# Altium PCB ChassisPowerDistroA_PSoC_1.0_GK.PcbDoc (part 1 of 2)
Units mil, origin at the board's own origin, x right, y up, seen from the top; angles counter-clockwise.
Board outline 6000 x 4000 mil, 4 copper layers (Top Layer, Int1 (GND), Int2 (PWR), Bottom Layer), stack 53.912 mil thick; 194 components, 92 nets, 571 pads, 130 vias.
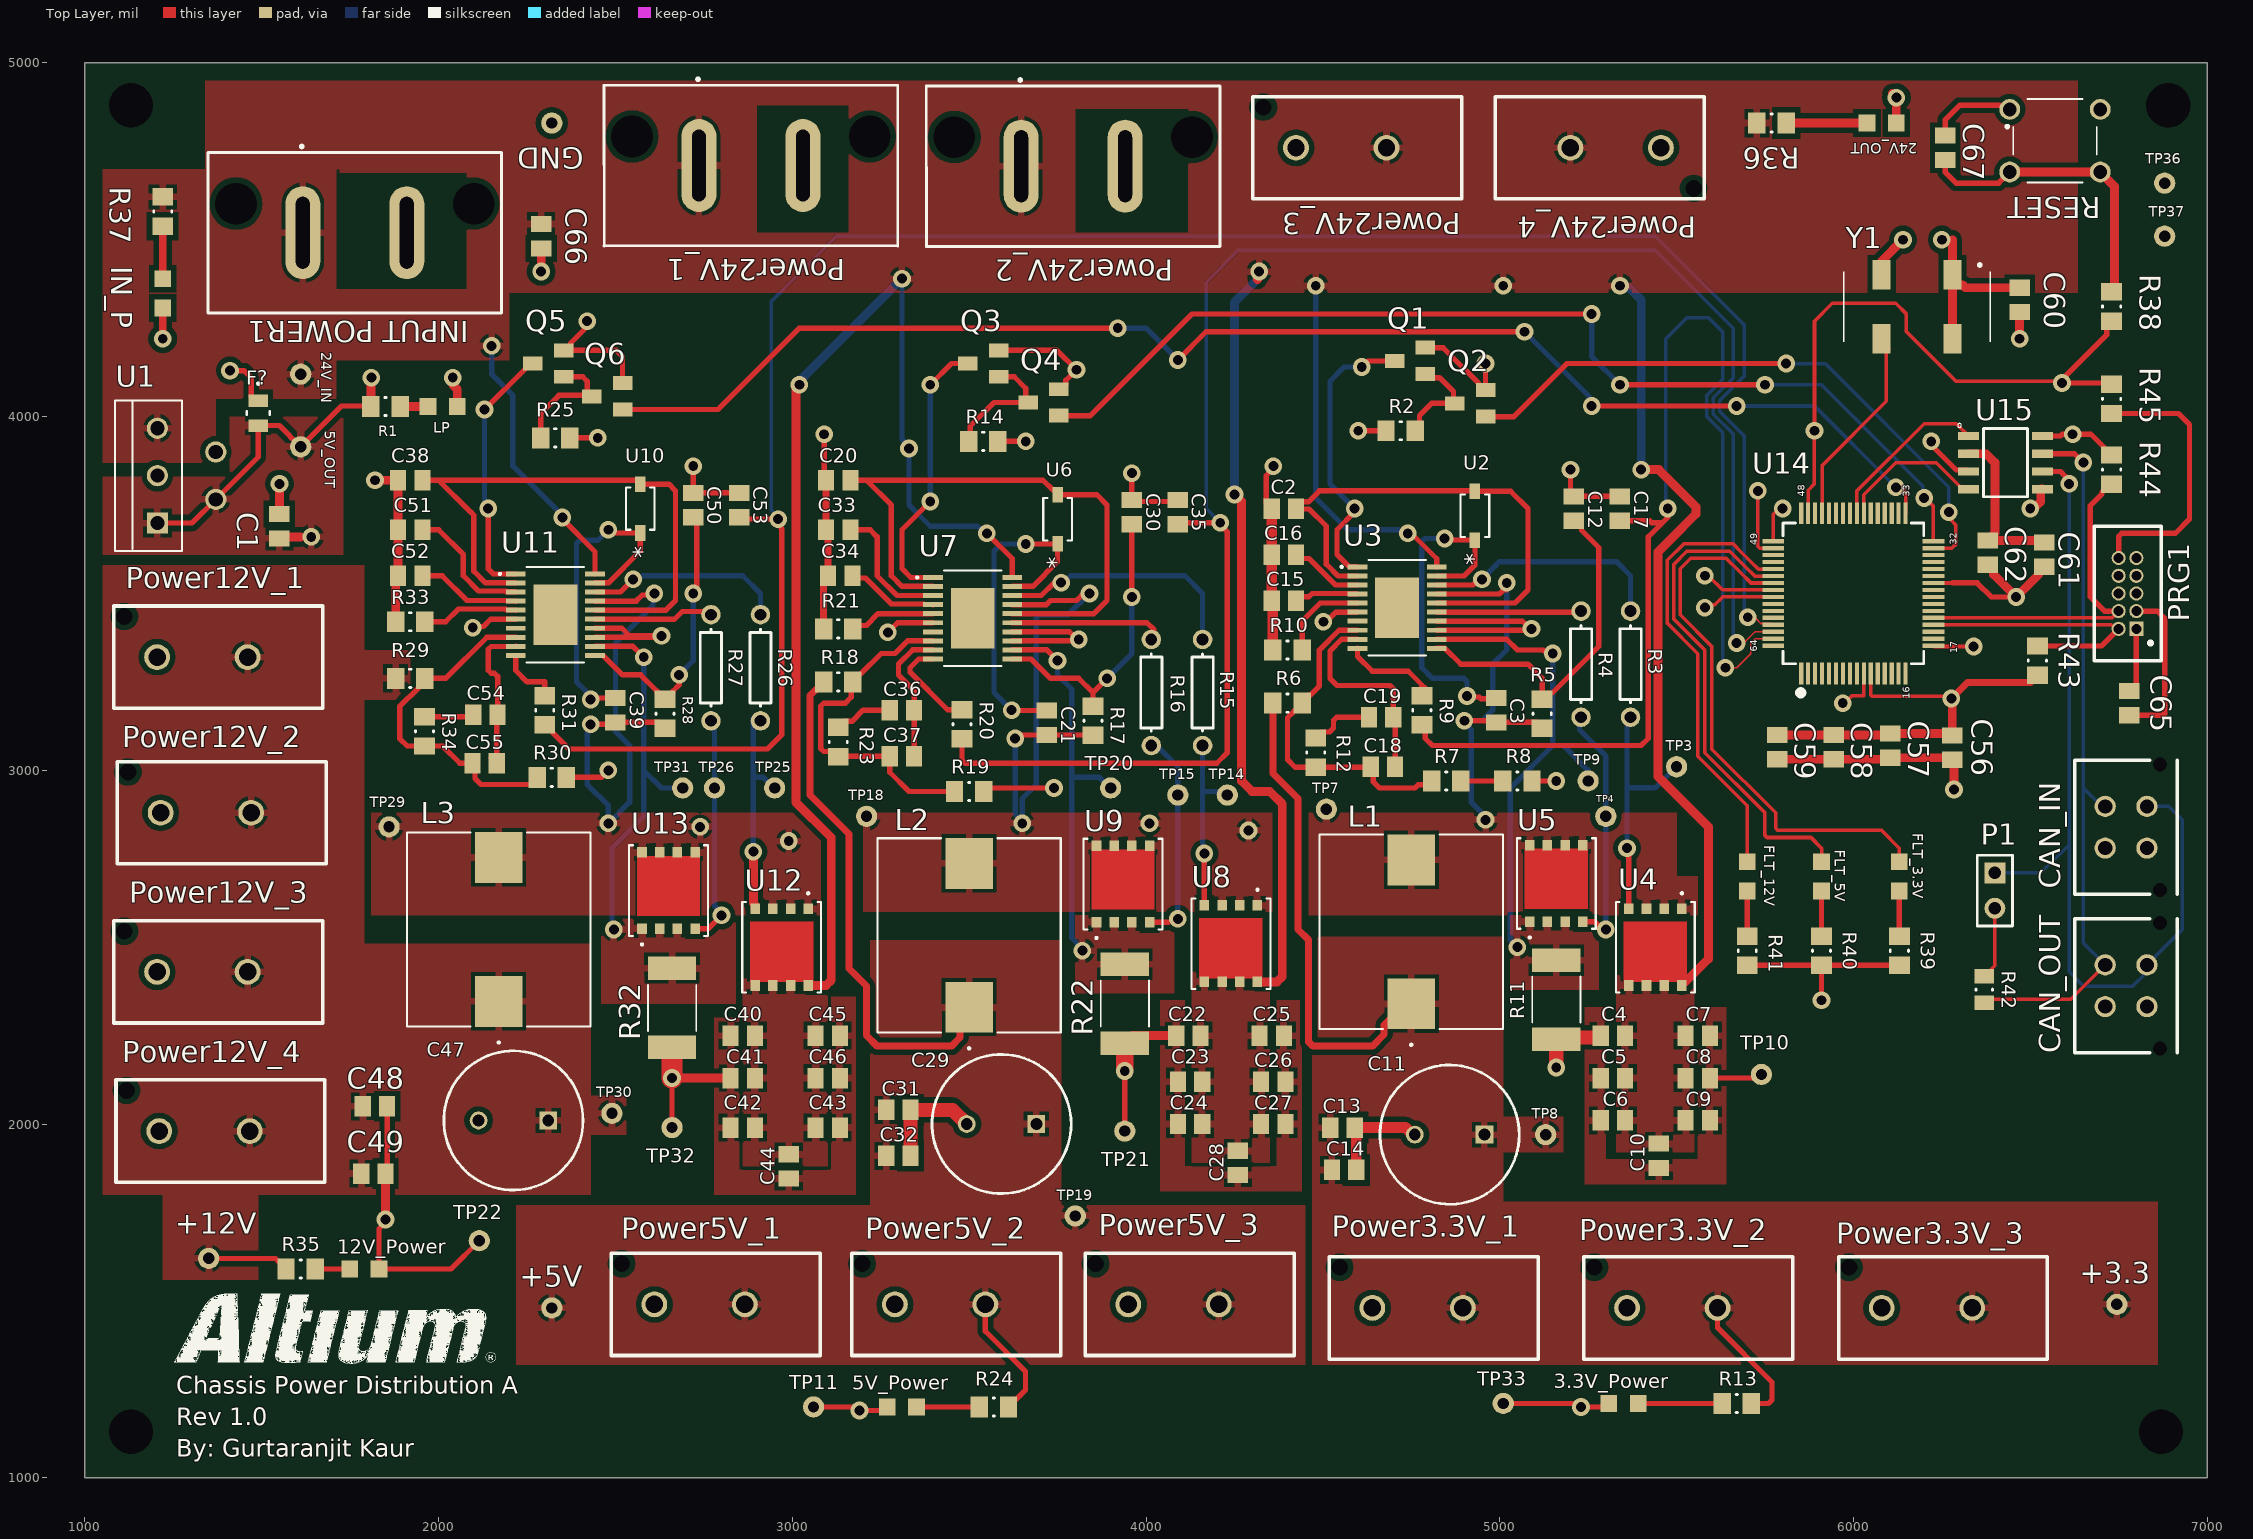
[diagram p0: Top Layer view]
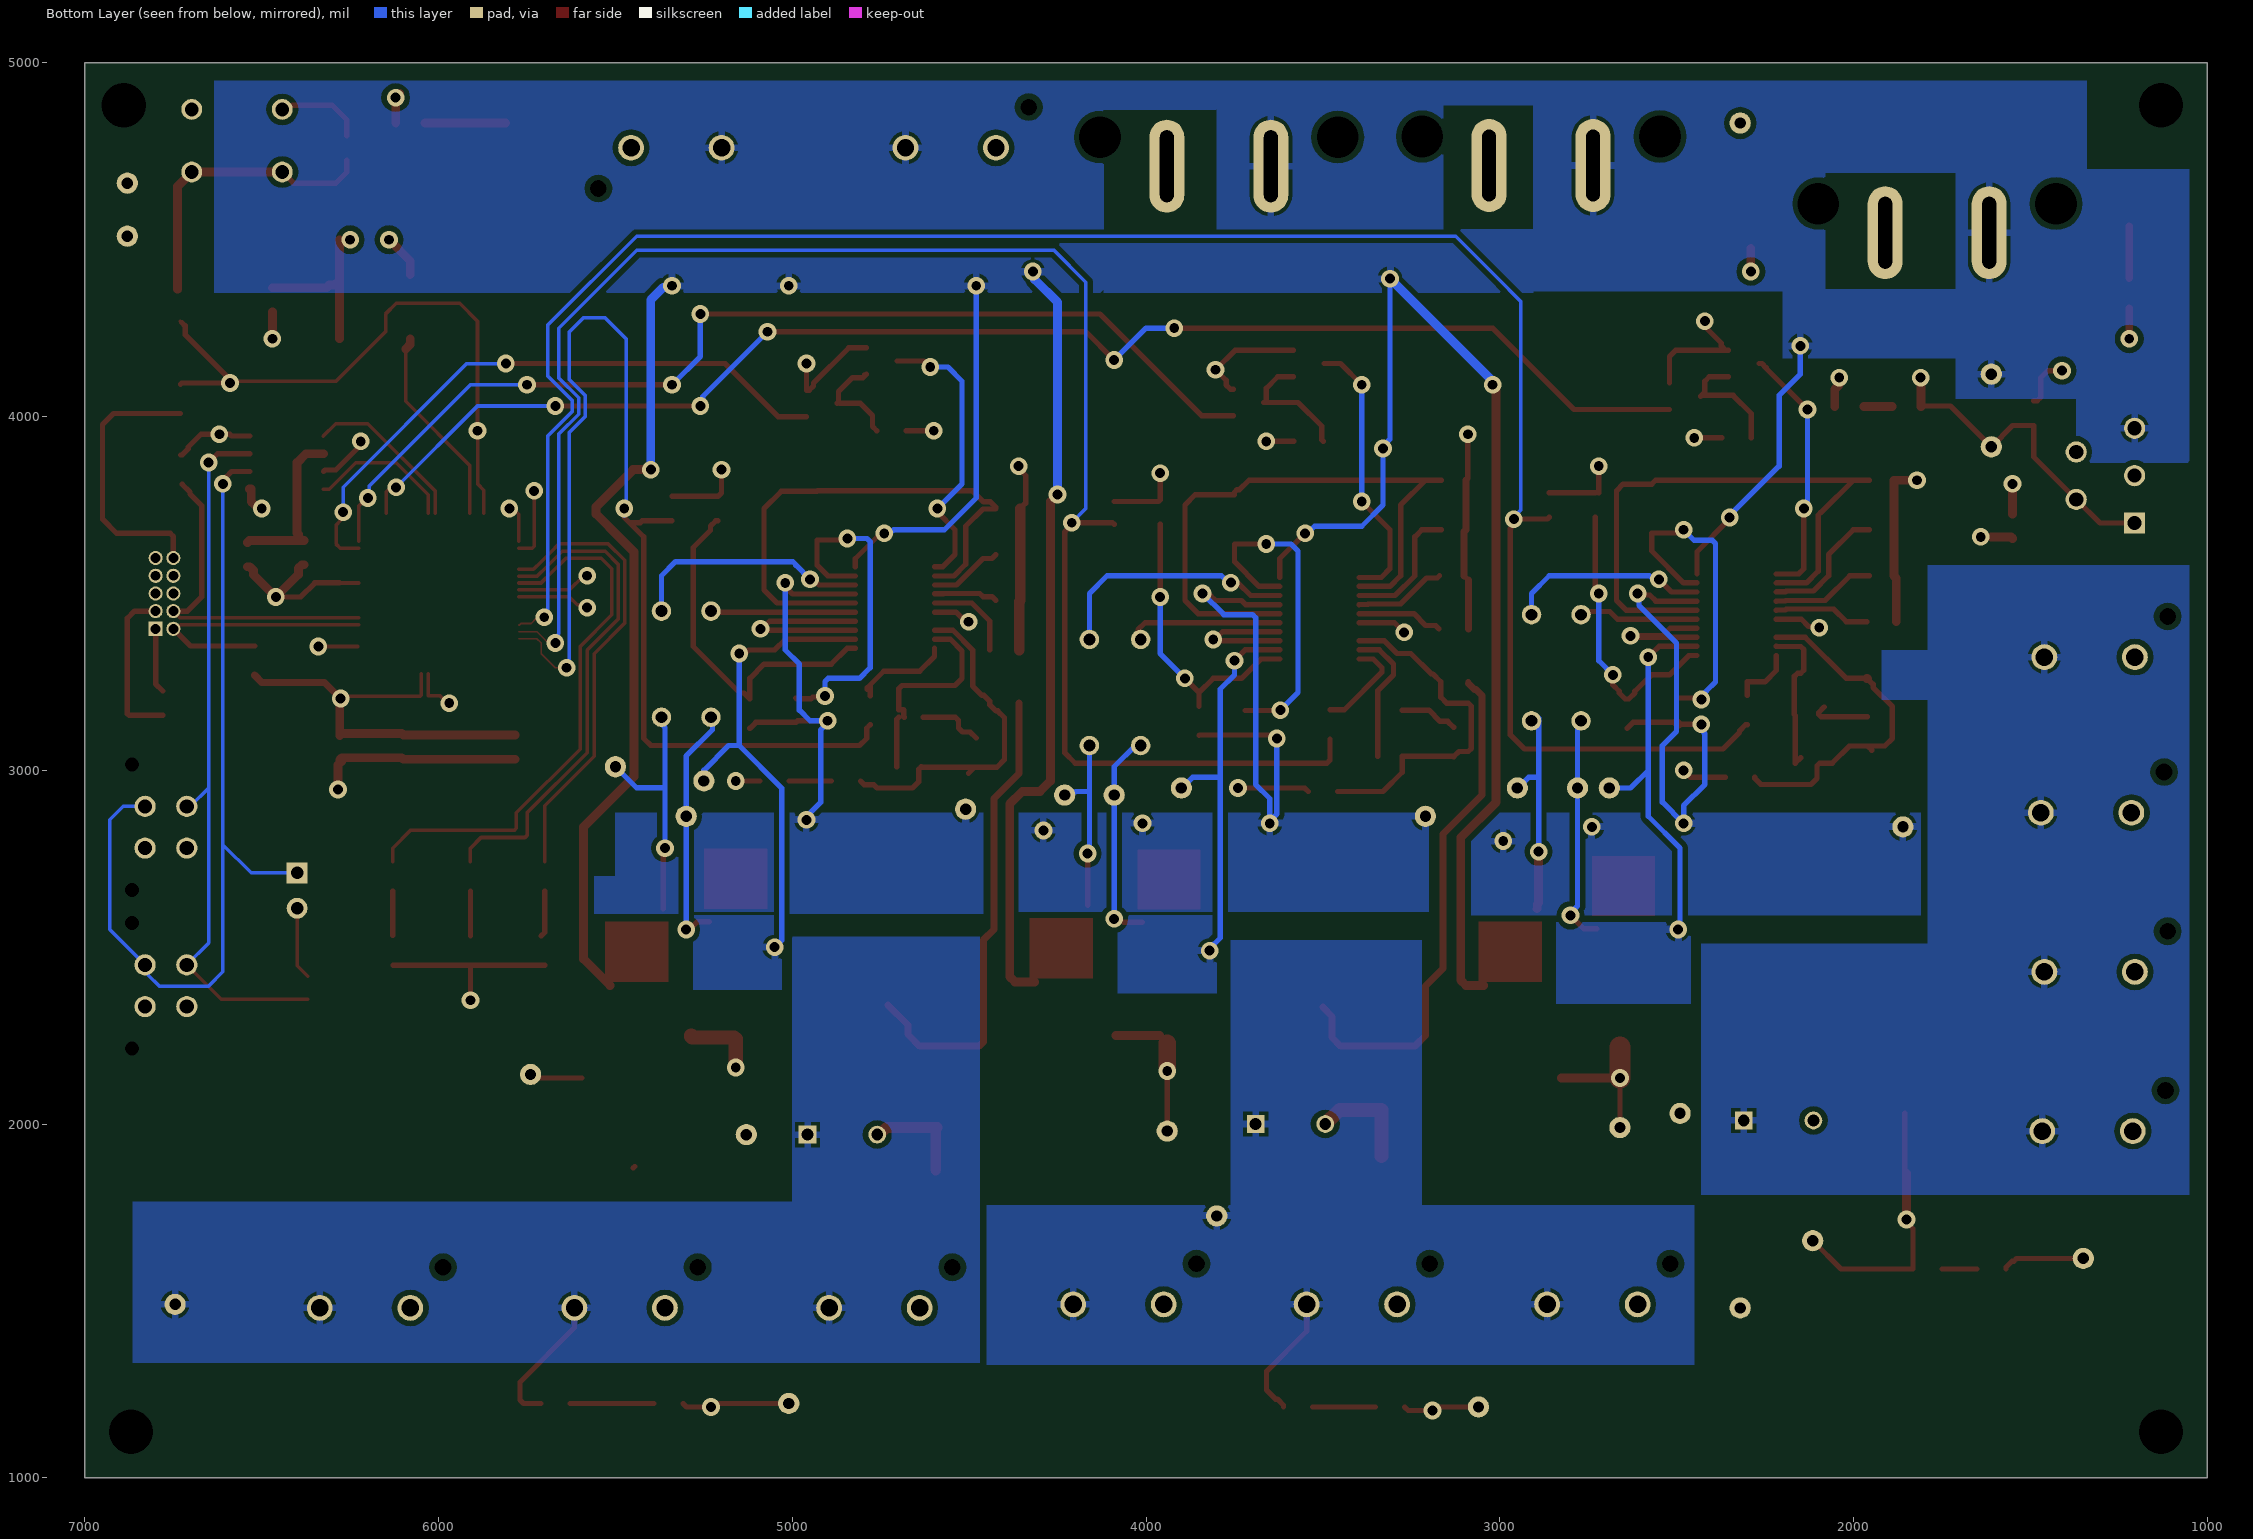
[diagram p1: Bottom Layer view, seen from below]
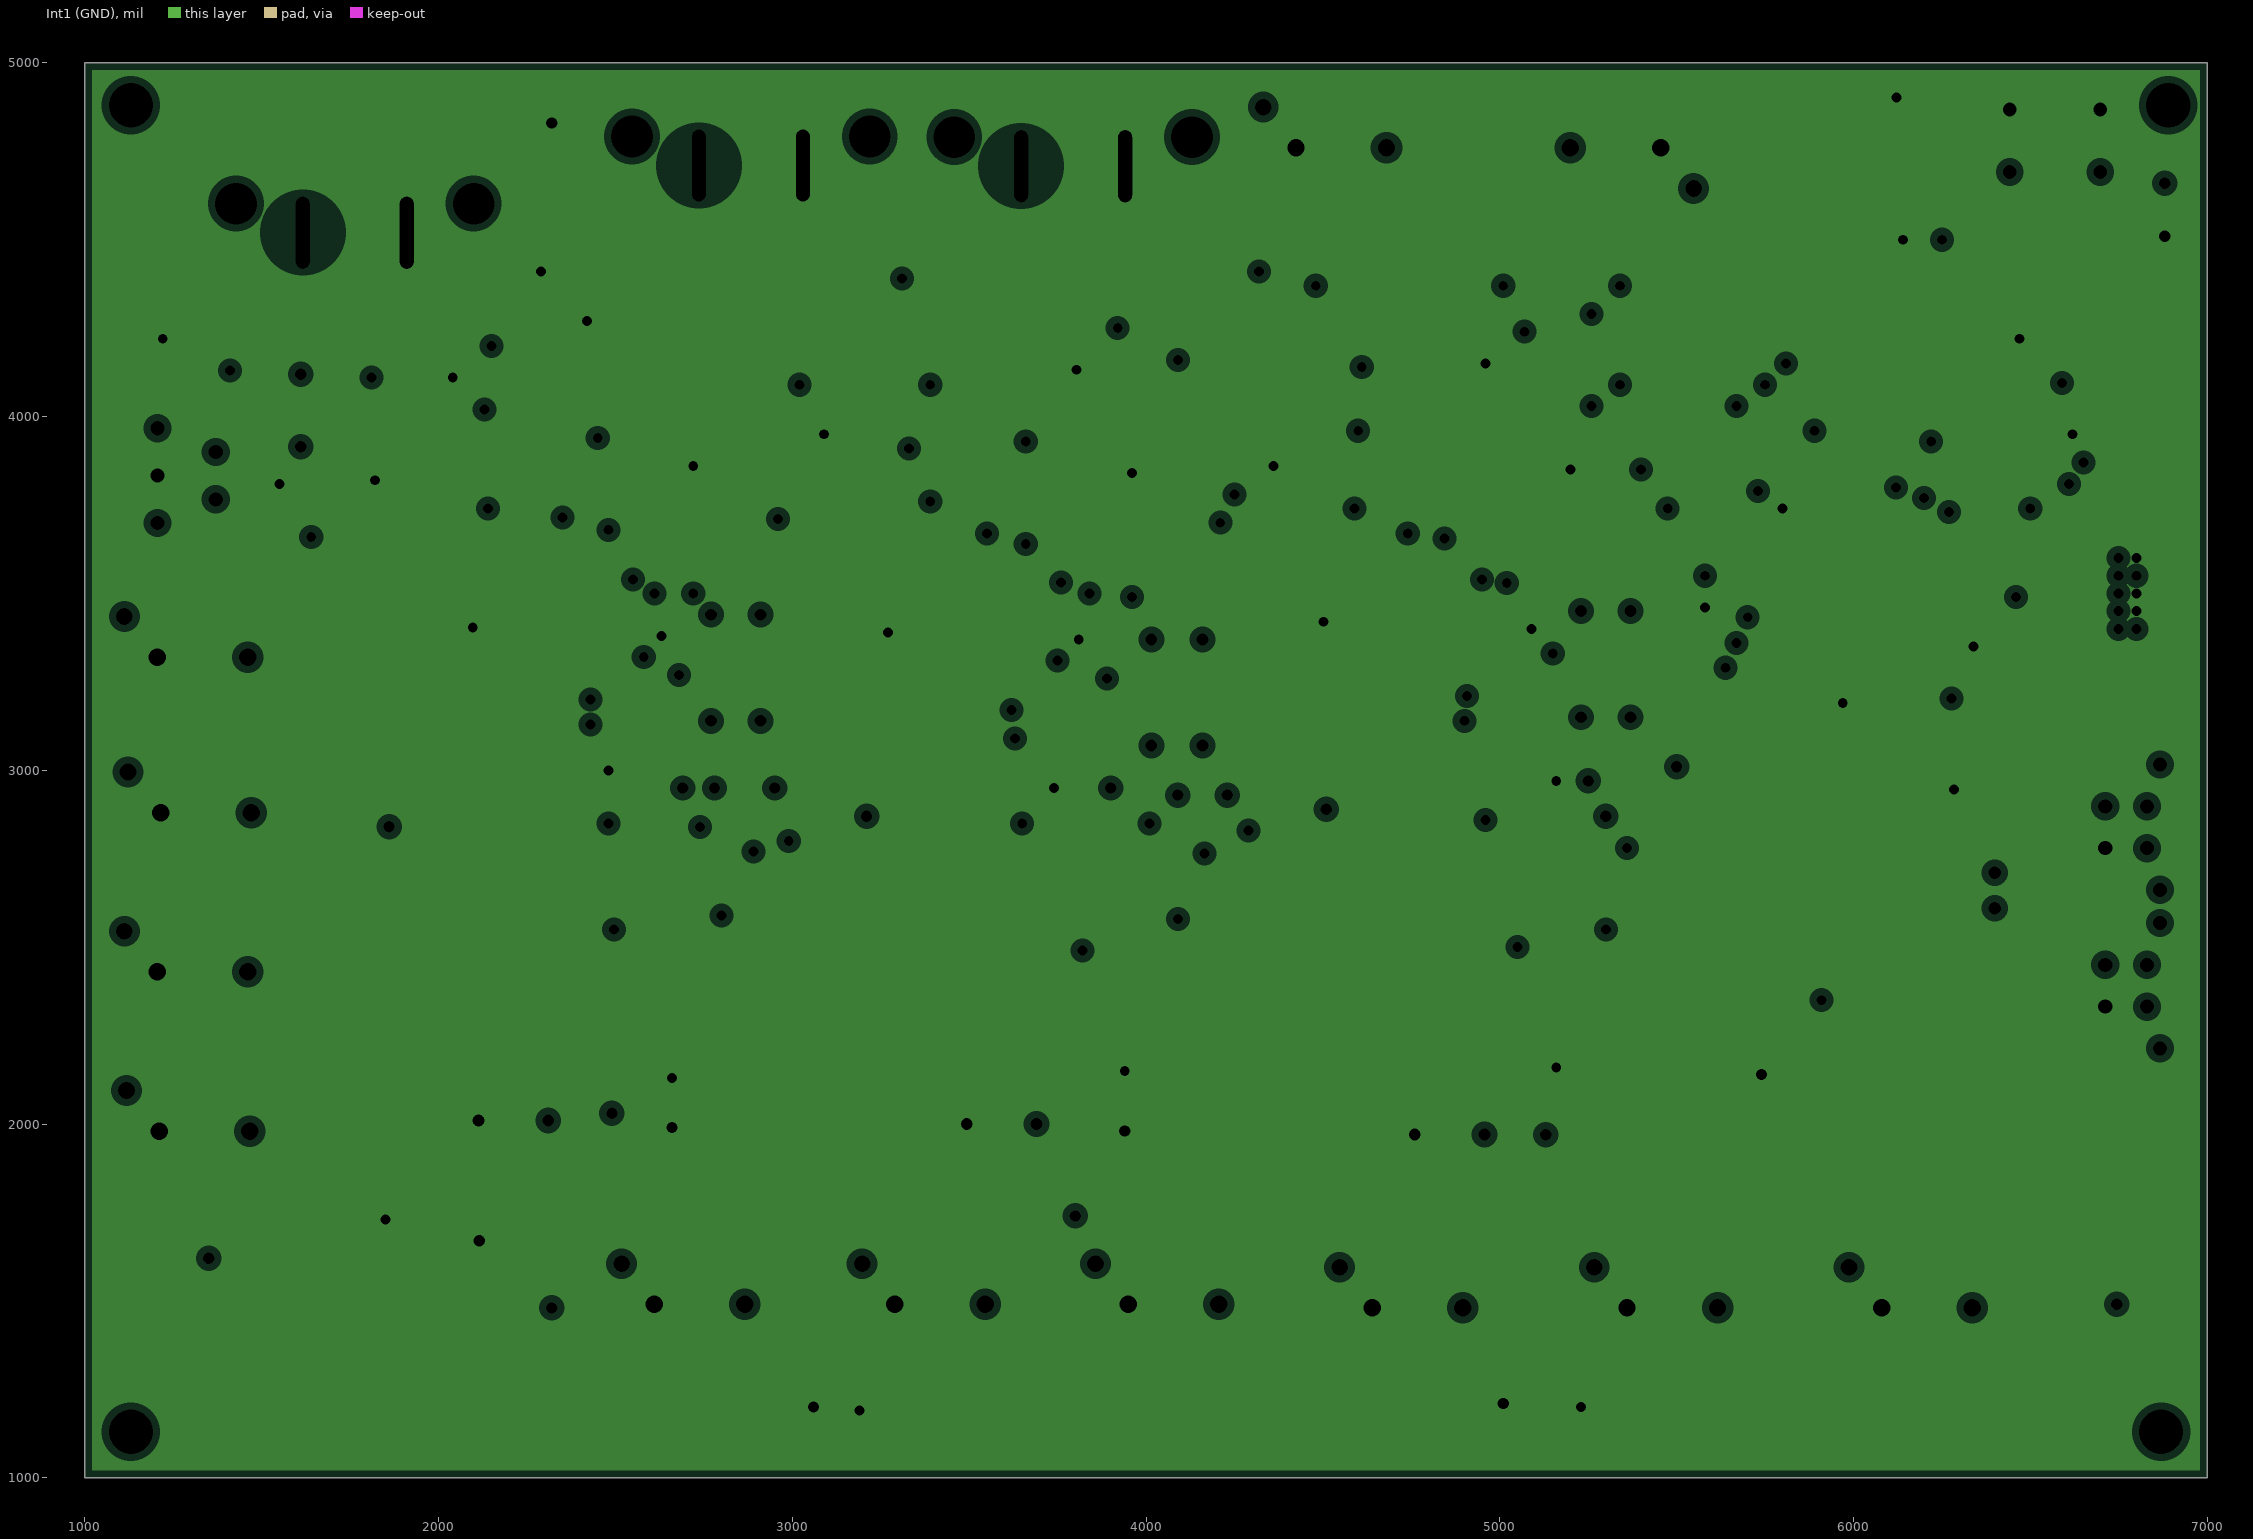
[diagram p2: Int1 (GND), clearances drawn from the general rule]
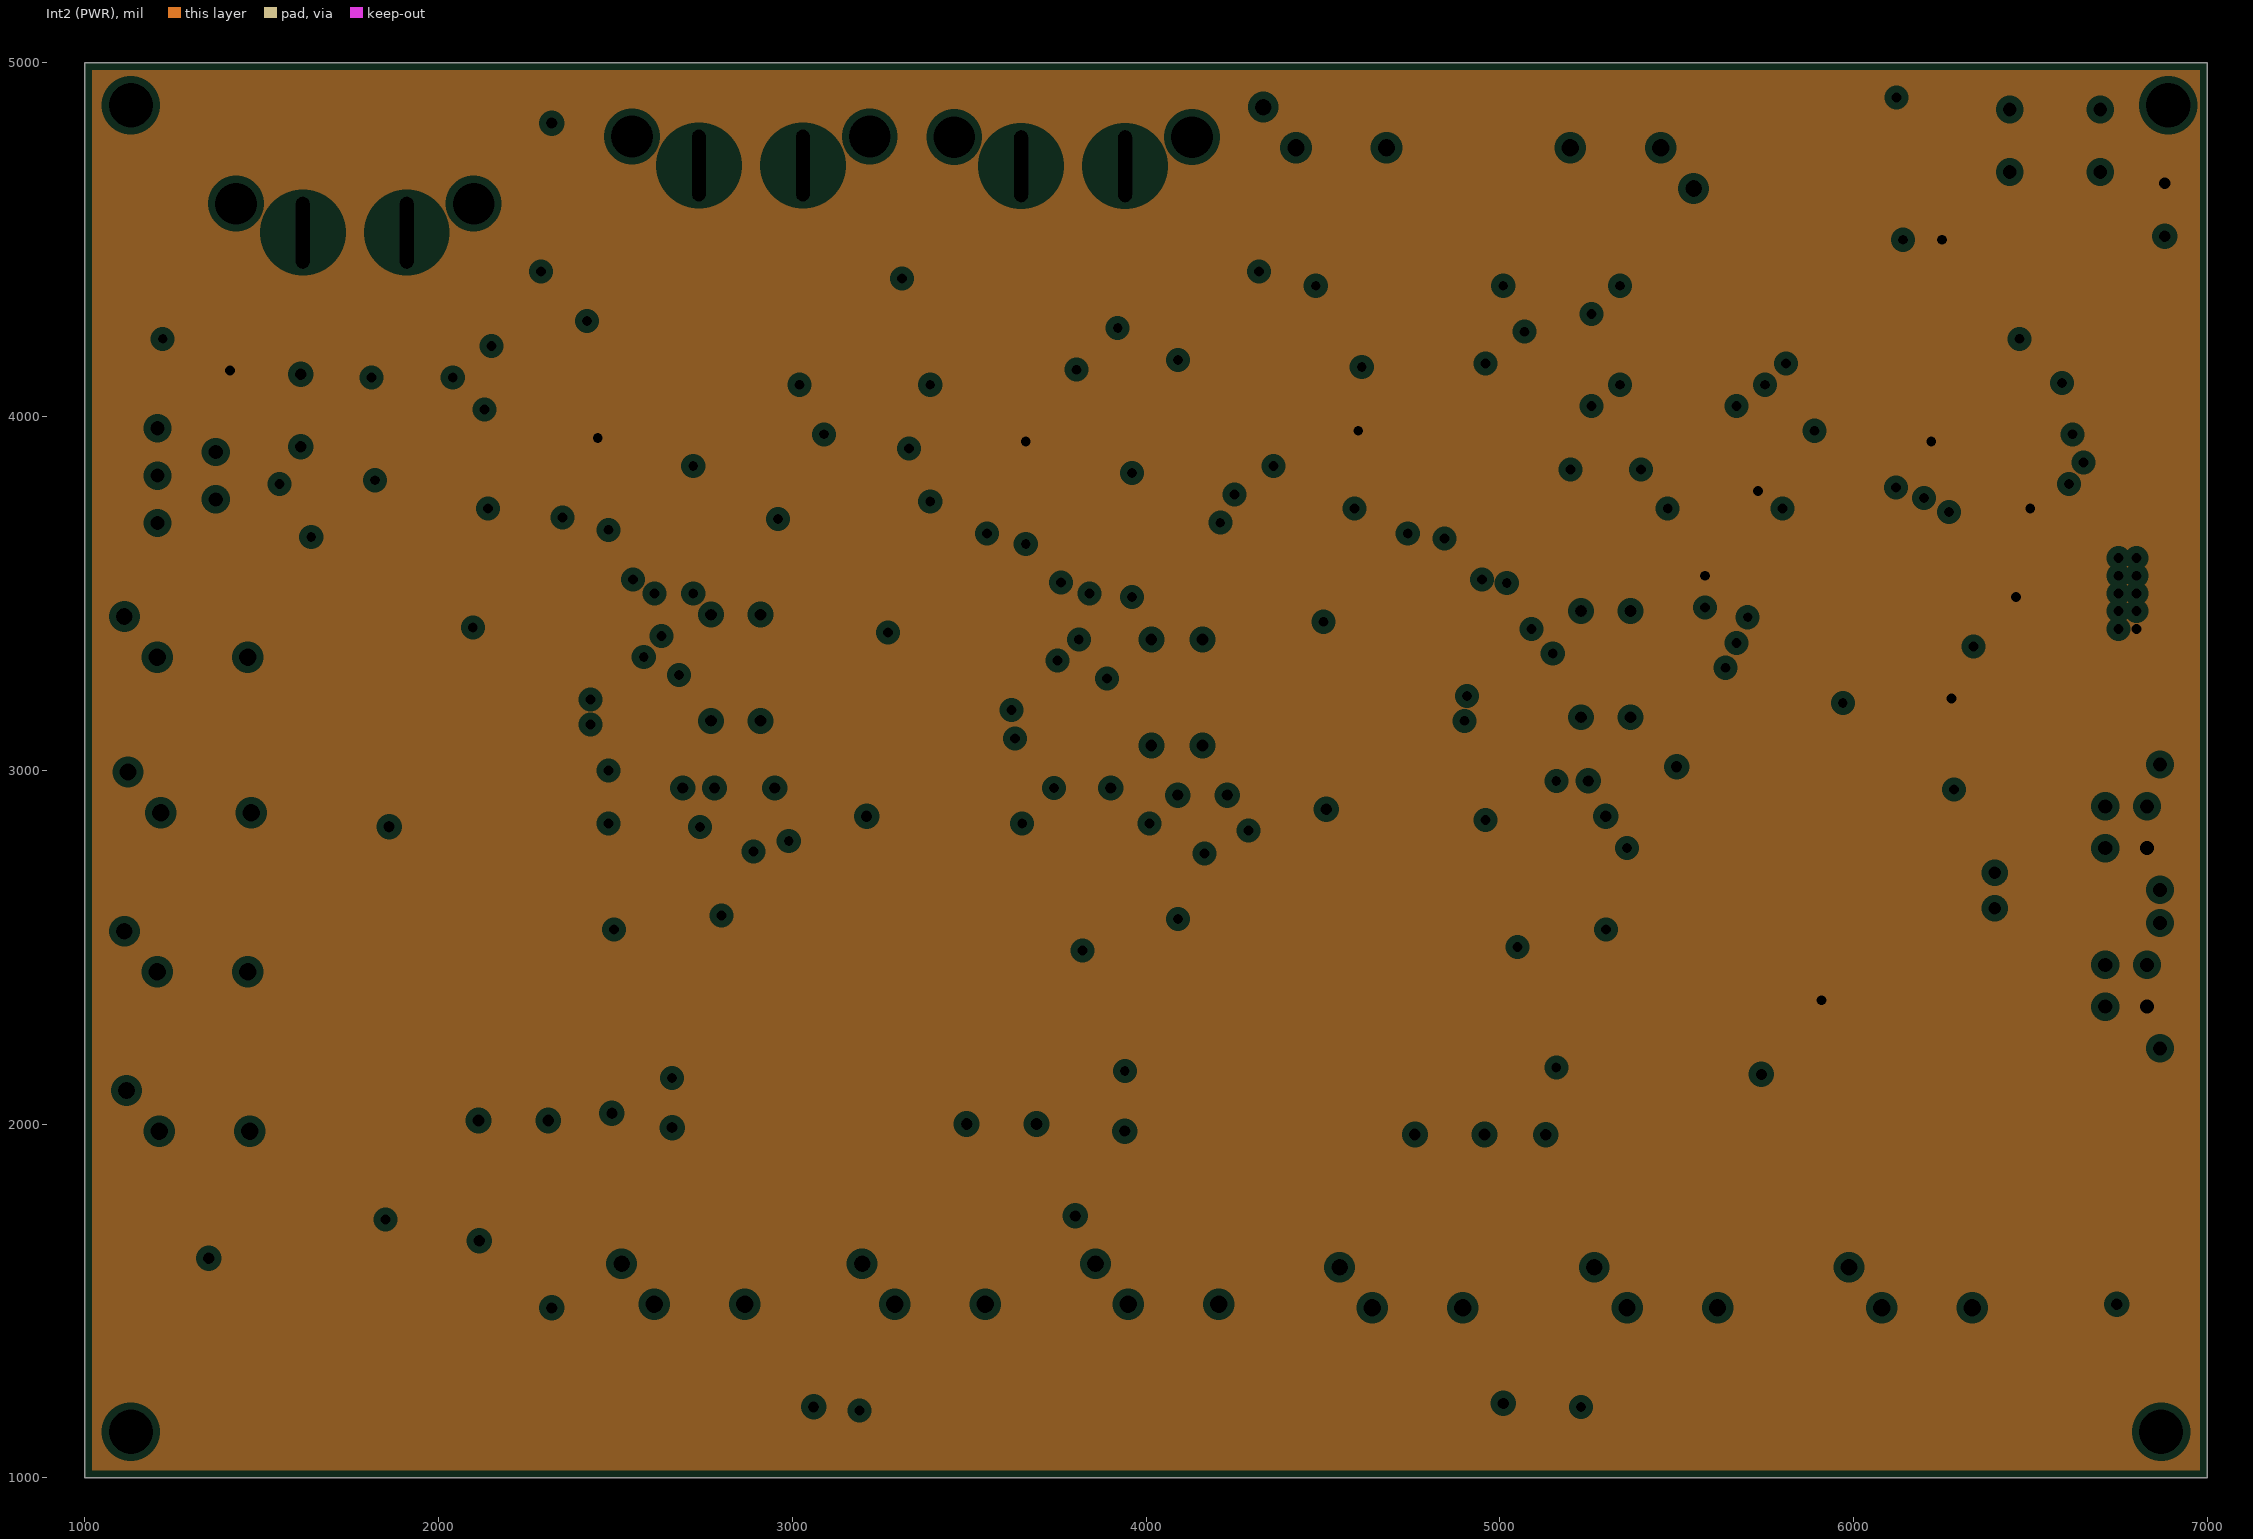
[diagram p3: Int2 (PWR), clearances drawn from the general rule]

## Layer stack, top to bottom
Top Solder: solder mask 1, SM-001, Dk 4
Top Layer: signal copper 1.378
Dielectric 1: prepreg 5.1, PP-017, Dk 4.3
Dielectric 2: prepreg 5.1, PP-017, Dk 4.3
Int1 (GND): plane copper 1.378, net GND
Dielectric 3: core 28, Core-039, Dk 4.8
Int2 (PWR): plane copper 1.378, net VCC
Dielectric 4: prepreg 5.1, PP-017, Dk 4.3
Dielectric 5: prepreg 5.1, PP-017, Dk 4.3
Bottom Layer: signal copper 1.378
Bottom Solder: solder mask 1, SM-001, Dk 4

## Board outline
1000,1000 7000,1000 7000,5000 1000,5000

## Design rules (kind name [scope] priority, off if disabled: settings)
BoardOutlineClearance [All] p1: gap=10 ignorepadtopadclearanceinfootprint=FALSE
Clearance [All] p1: gap=5 ignorepadtopadclearanceinfootprint=TRUE except(0: Arc-Hole Track-Hole SMDPad-Hole THPad-Hole Via-Hole Fill-Hole Poly-Hole Region-Hole Text-Hole; 8: Track-Track Track-SMDPad Track-THPad Track-Via; 10: Poly-Poly; 15: Arc-Poly Track-Poly SMDPad-Poly THPad-Poly Via-Poly Fill-Poly)
ComponentClearance [All] p1: gap=0 collisioncheckmode=3 verticalgap=100000 showdistances=FALSE
Height [All] p1: minheight=0 maxheight=2000 prefheight=500
HoleSize [All] p1: absolutevalues=TRUE maxlimit=205 minlimit=10 maxpercent=80.000 minpercent=20.000
MinimumAnnularRing [All] p1: minimumring=6
MinimumSolderMaskSliver [All] p1: minsoldermaskwidth=3.5
PlaneClearance [All] p1: clearance=20
PlaneConnect [All] p1: planeconnectstyle=Direct reliefexpansion=20 reliefentries=4 reliefconductorwidth=20 reliefairgap=10
PolygonConnect [All] p1: connectstyle=Relief reliefconductorwidth=20 reliefentries=4 polygonreliefangle="90 Angle" airgapwidth=10
RoutingVias [All] p1: holewidth=10 width=25 viastyle="Through Hole" minholewidth=10 minwidth=25 maxholewidth=28 maxwidth=50
SilkToSolderMaskClearance [IsPad] p1: minsilkscreentomaskgap=5 clearancetoexposedcopper=TRUE
SolderMaskExpansion [All] p1: expansion=4 istentingtop=FALSE
Width [All] p1: maxlimit=200 minlimit=5 preferedwidth=10 minimp=50.000000 maximp=50.000000 favimp=50.000000
23 further rules are at their usual default settings.

## Classes and differential pairs
component class Power_24V: 24V_OUT C66 GND IN_P "INPUT POWER1" Power24V_1 Power24V_2 Power24V_3 Power24V_4 R36 R37
component class Power_12V: 12V_Power +12V C38 C39 C40 C41 C42 C43 C44 C45 C46 C47 C48 C49 C50 C51 C52 C53 C54 C55 L3 Power12V_1 Power12V_2 Power12V_3 Power12V_4 Q5 Q6 R25 R26 R27 R28 R29 R30 R31 R32 R33 R34 R35 TP25 TP26 TP29 TP30 TP31 TP32 TP33 U10 U11 U12 U13
component class Power_5V: 5V_Power +5V C20 C21 C22 C23 C24 C25 C26 C27 C28 C29 C30 C31 C32 C33 C34 C35 C36 C37 L2 Power5V_1 Power5V_2 Power5V_3 Q3 Q4 R14 R15 R16 R17 R18 R19 R20 R21 R22 R23 R24 TP14 TP15 TP18 TP19 TP20 TP21 TP22 U6 U7 U8 U9
component class Power_3.3V: 3.3V_Power +3.3 C2 C3 C4 C5 C6 C7 C8 C9 C10 C11 C12 C13 C14 C15 C16 C17 C18 C19 L1 Power3.3V_1 Power3.3V_2 Power3.3V_3 Q1 Q2 R2 R3 R4 R5 R6 R7 R8 R9 R10 R11 R12 R13 TP3 TP4 TP7 TP8 TP9 TP10 TP11 U2 U3 U4 U5
component class MCU_PSoC: C56 C57 C58 C59 C60 C61 C62 C65 C67 CAN_IN CAN_OUT FLT_3.3V FLT_5V FLT_12V P1 PRG1 R38 R39 R40 R41 R42 R43 R44 R45 RESET TP36 TP37 U14 U15 Y1
component class Local_Power_5V: 5V_OUT 24V_IN C1 F? LP R1 U1

## Components (designator, comment, footprint, x,y, rotation, side; value= is the part's Value field where it differs from the comment)
3.3V_Power "Yellow" *DIOC200X125X110_LTST-C171KSKT(Primary) 5350,1210 r0 top
5V_OUT "Test Point" "Test Point Through-hole" 1585,3934.61 r270 top
5V_Power "Yellow" *DIOC200X125X110_LTST-C171KSKT(Primary) 3310,1200 r0 top
12V_Power "Yellow" *DIOC200X125X110_LTST-C171KSKT(Primary) 1790,1590 r180 top
24V_IN "Test Point" "Test Point Through-hole" 1630,4145 r180 top
24V_OUT "Yellow" *DIOC200X125X110_LTST-C171KSKT(Primary) 6080,4830 r180 top
+3.3 "Test Point" "Test Point Through-hole" 6770,1470 r90 top
+5V "Test Point" "Test Point Through-hole" 2345,1460 r90 top
+12V "Test Point" "Test Point Through-hole" 1375,1600 r90 top
C1 "3.3u" *CAPC2012X88N 1550,3690 r270 top
C2 "470n" *CAPC2012X88N 4390,3740 r0 top
C3 "0.1u" *CAPC2012X88N 4990,3170 r90 top
C4 "2.2u" *CAPC2012X88N 5320,2250 r0 top
C5 "2.2u" *CAPC2012X88N 5320,2130 r0 top
C6 "2.2u" *CAPC2012X88N 5320,2010 r0 top
C7 "2.2u" *CAPC2012X88N 5560,2250 r180 top
C8 "2.2u" *CAPC2012X88N 5560,2130 r180 top
C9 "2.2u" *CAPC2012X88N 5560,2010 r180 top
C10 "2.2u" *CAPC2012X88N 5450,1910 r90 top
C11 "100u" CAPPRD500W65D1000H1800 4956.85,1970 r180 top
C12 "820p" *CAPC2012X88N 5210,3740 r270 top
C13 "22u" *CAPC2012X88N 4555.55,1990 r180 top
C14 "22u" *CAPC2012X88N 4560,1870 r180 top
C15 "15n" *CAPC2012X88N 4390,3480 r0 top
C16 "0.47u" *CAPC2012X88N 4390,3610 r0 top
C17 "1000p" *CAPC2012X88N 5340,3740 r270 top
C18 "82p" *CAPC2012X88N 4670,3010 r0 top
C19 "9n" *CAPC2012X88N 4664.45,3150 r0 top
C20 "470n" *CAPC2012X88N 3130,3820 r0 top
C21 "0.1u" *CAPC2012X88N 3720,3134.45 r90 top
C22 "2.2u" *CAPC2012X88N 4120,2250 r0 top
C23 "2.2u" *CAPC2012X88N 4124.45,2120 r0 top
C24 "2.2u" *CAPC2012X88N 4124.45,2000 r0 top
C25 "2.2u" *CAPC2012X88N 4355.55,2250 r180 top
C26 "2.2u" *CAPC2012X88N 4360,2120 r180 top
C27 "2.2u" *CAPC2012X88N 4360,2000 r180 top
C28 "2.2u" *CAPC2012X88N 4260,1890 r90 top
C29 "680u" CAPPRD500W65D1000H1800 3690,2000 r180 top
C30 "820p" *CAPC2012X88N 3960,3730 r270 top
C31 "22u" *CAPC2012X88N 3300,2040 r180 top
C32 "22u" *CAPC2012X88N 3300,1910 r180 top
C33 "0.47u" *CAPC2012X88N 3130,3680 r0 top
C34 "15n" *CAPC2012X88N 3135.55,3550 r0 top
C35 "1000p" *CAPC2012X88N 4090,3730 r270 top
C36 "820p" *CAPC2012X88N 3310,3170 r0 top
C37 "82p" *CAPC2012X88N 3310,3040 r0 top
C38 "470n" *CAPC2012X88N 1920,3820 r0 top
C39 "0.1u" *CAPC2012X88N 2500,3170 r90 top
C40 "2.2u" *CAPC2012X88N 2860,2250 r0 top
C41 "2.2u" *CAPC2012X88N 2860,2130 r0 top
C42 "2.2u" *CAPC2012X88N 2860,1990 r0 top
C43 "2.2u" *CAPC2012X88N 3100,1990 r180 top
C44 "2.2u" *CAPC2012X88N 2990,1880 r90 top
C45 "2.2u" *CAPC2012X88N 3100,2250 r180 top
C46 "2.2u" *CAPC2012X88N 3100,2130 r180 top
C47 "100u" CAPPRD500W65D1000H1800 2310,2010 r180 top
C48 "22u" *CAPC2012X88N 1820,2050 r180 top
C49 "22u" *CAPC2012X88N 1815.55,1860 r180 top
C50 "820p" *CAPC2012X88N 2720,3750 r270 top
C51 "0.47u" *CAPC2012X88N 1920,3680 r0 top
C52 "15n" *CAPC2012X88N 1920,3550 r0 top
C53 "1000p" *CAPC2012X88N 2850,3750 r270 top
C54 "4n" *CAPC2012X88N 2132.48,3157.52 r0 top
C55 "12p" *CAPC2012X88N 2130,3020 r0 top
C56 "10u" *CAPC2012X88N 6279.45,3064.21 r270 top
C57 "0.1u" *CAPC2012X88N 6104.45,3070 r270 top
C58 "10u" *CAPC2012X88N 5944.45,3065.55 r270 top
C59 "0.1u" *CAPC2012X88N 5784.45,3065.55 r270 top
C60 "0.1u" *CAPC2012X88N 6470,4330 r90 top
C61 "10u" *CAPC2012X88N 6540,3610 r270 top
C62 "0.1u" *CAPC2012X88N 6380,3615.55 r270 top
C65 "10u" *CAPC2012X88N 6780,3190 r90 top
C66 "22u" *CAPC2012X88N 2290,4510 r90 top
C67 "0.1u" *CAPC2012X88N 6260,4760 r270 top
CAN_IN "Molex Micro" 0430450427 6770.94,2839.06 r90 top
CAN_OUT "Molex Micro" 0430450427 6770.94,2390.94 r90 top
F? "MFU0805FF02000P500" FUS_VISHAY_MFU08 1490,4010 r270 top value=Value
FLT_3.3V "Red" *DIOC200X125X110_LTST-C171KSKT(Primary) 6130,2700 r270 top
FLT_5V "Red" *DIOC200X125X110_LTST-C171KSKT(Primary) 5910,2700 r270 top
FLT_12V "Red" *DIOC200X125X110_LTST-C171KSKT(Primary) 5700,2700 r270 top
GND "Test Point" "Test Point Through-hole" 2345,4810 r90 top
IN_P "Yellow" *DIOC200X125X110_LTST-C171KSKT(Primary) 1220,4348.66 r90 top
"INPUT POWER1" "Super Saber" 1720420202 2178,4747 r180 top
L1 "6.8u" IND_BOURNS_SRP12 4750,2543.5 r90 top value=Value
L2 "6.8u" IND_BOURNS_SRP12 3500,2533.5 r90 top value=Value
L3 "15u" IND_BOURNS_SRP12 2170,2550 r90 top value=Value
LP "Yellow" *DIOC200X125X110_LTST-C171KSKT(Primary) 2011.34,4028.66 r180 top
P1 "Header 2" HDR1X2 6400,2710 r270 top
Power3.3V_1 "1510482204" 1510482204 5108.5,1335.51 r90 top
Power3.3V_2 "1510482204" 1510482204 5828.5,1335.51 r90 top
Power3.3V_3 "1510482204" 1510482204 6548.5,1335.51 r90 top
Power5V_1 "1510482204" 1510482204 3078.5,1345.51 r90 top
Power5V_2 "1510482204" 1510482204 3758.5,1345.51 r90 top
Power5V_3 "1510482204" 1510482204 4418.5,1345.51 r90 top
Power12V_1 "1510482204" 1510482204 1672.6,3175.51 r90 top
Power12V_2 "1510482204" 1510482204 1682.6,2735.51 r90 top
Power12V_3 "1510482204" 1510482204 1672.6,2285.51 r90 top
Power12V_4 "1510482204" 1510482204 1678.5,1835.51 r90 top
Power24V_1 "Super Saber" 1720420202 3298,4937 r180 top
Power24V_2 "Super Saber" 1720420202 4209,4935 r180 top
Power24V_3 "1510482204" 1510482204 4892.6,4615.51 r90 top
Power24V_4 "1510482204" 1510482204 4987.4,4904.49 r270 top
PRG1 "SAMTEC-FTSH-105-01-X-D" SAMTEC-FTSH-105-01-X-D 6800,3400 r90 top
Q1 "2N7002" *SOT23 4746.69,4157.4 r90 top
Q2 "2N7002" *SOT23 4916.69,4037.4 r90 top
Q3 "2N7002" *SOT23 3540,4150 r90 top
Q4 "2N7002" *SOT23 3710,4040 r90 top
Q5 "2N7002" *SOT23 2310,4150 r90 top
Q6 "2N7002" *SOT23 2476.69,4057.4 r90 top
R1 "200" RESC0805(2012)_M 1850,4028.66 r180 top value="8060000.00 Ohm"
R2 "4.32k" RESC0805(2012)_M 4720,3960 r180 top value="8060000.00 Ohm"
R3 "5" AXIAL-0.3 5370,3300 r270 top value="120.00 Ohm"
R4 "5" AXIAL-0.3 5230,3300 r270 top value="120.00 Ohm"
R5 "45.3k" RESC0805(2012)_M 5120,3160 r270 top value="8060000.00 Ohm"
R6 "2k" RESC0805(2012)_M 4400,3190 r180 top value="8060000.00 Ohm"
R7 "316" RESC0805(2012)_M 4848.66,2970 r180 top value="8060000.00 Ohm"
R8 "340" RESC0805(2012)_M 5050,2970 r180 top value="8060000.00 Ohm"
R9 "5.1k" RESC0805(2012)_M 4780,3170 r270 top value="8060000.00 Ohm"
R10 "12.1k" RESC0805(2012)_M 4400,3340 r0 top value="8060000.00 Ohm"
R11 "12m" *RESC6432X110N 5160,2351.46 r90 top
R12 "8.76k" RESC0805(2012)_M 4480,3050 r90 top value="8060000.00 Ohm"
R13 "86.7" RESC0805(2012)_M 5670,1210 r0 top value="8060000.00 Ohm"
R14 "4.32k" RESC0805(2012)_M 3540,3930 r0 top value="8060000.00 Ohm"
R15 "5" AXIAL-0.3 4160,3220 r270 top value="120.00 Ohm"
R16 "5" AXIAL-0.3 4015,3220 r270 top value="120.00 Ohm"
R17 "68.1k" RESC0805(2012)_M 3850,3140 r270 top value="8060000.00 Ohm"
R18 "6.04k" RESC0805(2012)_M 3130,3250 r180 top value="8060000.00 Ohm"
R19 "1.15k" RESC0805(2012)_M 3500,2940 r180 top value="8060000.00 Ohm"
R20 "5.1k" RESC0805(2012)_M 3480,3130 r270 top value="8060000.00 Ohm"
R21 "12.1k" RESC0805(2012)_M 3130,3400 r0 top value="8060000.00 Ohm"
R22 "12m" *RESC6432X110N 3940,2340 r90 top
R23 "44.2k" RESC0805(2012)_M 3130,3080 r90 top value="8060000.00 Ohm"
R24 "200" RESC0805(2012)_M 3570,1200 r0 top value="8060000.00 Ohm"
R25 "4.32k" RESC0805(2012)_M 2330,3940 r0 top value="8060000.00 Ohm"
R26 "5" AXIAL-0.3 2910,3290 r270 top value="120.00 Ohm"
R27 "5" AXIAL-0.3 2770,3290 r270 top value="120.00 Ohm"
R28 "154k" RESC0805(2012)_M 2640,3160 r270 top value="8060000.00 Ohm"
R29 "14k" RESC0805(2012)_M 1920,3260 r180 top value="8060000.00 Ohm"
R30 "1k" RESC0805(2012)_M 2320,2980 r180 top value="8060000.00 Ohm"
R31 "5.1k" RESC0805(2012)_M 2300,3170 r270 top value="8060000.00 Ohm"
R32 "12m" *RESC6432X110N 2660,2328.54 r90 top
R33 "12.1k" RESC0805(2012)_M 1920,3420 r0 top value="8060000.00 Ohm"
R34 "60.8k" RESC0805(2012)_M 1960,3110 r90 top value="8060000.00 Ohm"
R35 "667" RESC0805(2012)_M 1610,1590 r180 top value="8060000.00 Ohm"
R36 "1.47k" RESC0805(2012)_M 5768.66,4830 r180 top value="8060000.00 Ohm"
R37 "1.47k" RESC0805(2012)_M 1220,4580 r90 top value="8060000.00 Ohm"
R38 "100R" RESC0805(2012)_M 6730,4311.34 r270 top value="8060000.00 Ohm"
R39 "200" RESC0805(2012)_M 6130,2490 r270 top value="8060000.00 Ohm"
R40 "200" RESC0805(2012)_M 5910,2490 r270 top value="8060000.00 Ohm"
R41 "200" RESC0805(2012)_M 5700,2490 r270 top value="8060000.00 Ohm"
R42 "120R" RESC0805(2012)_N 6370,2380 r270 top value="120.00 Ohm"
R43 "47k" RESC0805(2012)_M 6520,3310 r90 top value="8060000.00 Ohm"
R44 "47k" RESC0805(2012)_M 6730,3850 r90 top value="8060000.00 Ohm"
R45 "100R" RESC0805(2012)_M 6730,4050 r270 top value="8060000.00 Ohm"
RESET "1825910-7" "Switch 6mm 24V (NO)" 6570,4780 r0 top
TP3 "" "Test Point Through-hole" 5525,2990 r90 top
TP4 "" "Test Point Through-hole" 5325,2850 r90 top
TP7 "Test Point" "Test Point Through-hole" 4535,2870 r90 top
TP8 "Test Point" "Test Point Through-hole" 5155,1950 r90 top
TP9 "Test Point" "Test Point Through-hole" 5275,2950 r90 top
TP10 "Test Point" "Test Point Through-hole" 5765,2120 r90 top
TP11 "Test Point" "Test Point Through-hole" 3085,1180 r90 top
TP14 "" "Test Point Through-hole" 4255,2910 r90 top
TP15 "" "Test Point Through-hole" 4115,2910 r90 top
TP18 "Test Point" "Test Point Through-hole" 3235,2850 r90 top
TP19 "Test Point" "Test Point Through-hole" 3825,1720 r90 top
TP20 "Test Point" "Test Point Through-hole" 3925,2930 r90 top
TP21 "Test Point" "Test Point Through-hole" 3965,1960 r90 top
TP22 "Test Point" "Test Point Through-hole" 2140,1650 r90 top
TP25 "" "Test Point Through-hole" 2975,2930 r90 top
TP26 "" "Test Point Through-hole" 2805,2930 r90 top
TP29 "Test Point" "Test Point Through-hole" 1885,2820 r90 top
TP30 "Test Point" "Test Point Through-hole" 2515,2010 r90 top
TP31 "Test Point" "Test Point Through-hole" 2715,2930 r90 top
TP32 "Test Point" "Test Point Through-hole" 2685,1970 r90 top
TP33 "Test Point" "Test Point Through-hole" 5035,1190 r90 top
TP36 "Test Point" "Test Point Through-hole" 6905,4640 r90 top
TP37 "Test Point" "Test Point Through-hole" 6905,4490 r90 top
U1 "Part Number: LT1129CT-5#PBF" TO220-5_T 1155,3967 r90 top value=Value
U2 "CDBW46-G" CDBW 4930,3720 r90 top value=Value
U3 "Part Number: LM25117QPMH/NOPB" MXA20A 4710,3460 r0 top value=Value
U4 "CSD18514Q5A" DQJ0008A 5440,2500 r270 top value=40V
U5 "CSD18514Q5A" DQJ0008A 5160,2680 r90 top value=40V
U6 "CDBW46-G" CDBW 3750,3710 r90 top value=Value
U7 "Part Number: LM25117QPMH/NOPB" MXA20A 3510,3430 r0 top value=Value
U8 "CSD18514Q5A" DQJ0008A 4240,2510 r270 top value=40V
U9 "CSD18514Q5A" DQJ0008A 3935,2678.37 r90 top value=40V
U10 "CDBW46-G" CDBW 2570,3740 r90 top value=Value
U11 "Part Number: LM25117QPMH/NOPB" MXA20A 2330,3440 r0 top value=Value
U12 "CSD18514Q5A" DQJ0008A 2970,2500 r270 top value=40V
U13 "CSD18514Q5A" DQJ0008A 2650,2660 r90 top value=40V
U14 "CY8C4248AZI-L485" TQFP50P1200X1200X160-64N 6000,3500 r90 top
U15 "MCP2562-E/SN" SOIC127P600X175-8N 6430,3870 r0 top
Y1 "SG-636PCW_50.0000MC3__ROHS" SG-636 6180,4310.55 r180 top

## Footprints (in the part's own frame and the unit in brackets; to place one, negate y for a bottom-side part, rotate by r counter-clockwise, add the part's x,y. Pads: shape width x height; smd on the part's side, far side on the other; paste and mask are expansions set on the pad)
0430450427 [mil] "Molex micro-fit 3.0 4 pos"
  round 60 hole 40: 1(-59.06,59.06) 2(-59.06,-59.06) 3(59.06,59.06) 4(59.06,-59.06)
  round 0 hole 40 unplated: 7(177.17,-96.06) ""(-177.17,-96.06)
  silkscreen extent -190,-145 190,145
1510482204 [mm]
  round 1.85 hole 1.25: 1(3.67,5.4) 2(3.67,11.9)
  round 0 hole 1.2 unplated: 9(6.59,14.25)
  Top Layer region: 4.826,3.175
  silkscreen extent 0,0 7.34,15
1720420202 [mil] "Molex Super Sabre connector, board mount"
  oval 99x263 hole 203 slot 39 at 0 deg: 1(562,227) 2(268,227)
  round 0 hole 118: ""(79,145) ""(751,145)
  silkscreen extent 0,-21 830,455
*CAPC2012X88N [mm]
  rect 1.16x1.47 smd: 1(-0.875,0) 2(0.875,0)
*DIOC200X125X110_LTST-C171KSKT(Primary) [mm]
  rect 1.2x1.2 smd: NEG(-1.05,0) POS(1.05,0)
*RESC6432X110N [mm]
  rect 1.7x3.46 smd: 1(-2.831,0) 2(2.831,0)
  silkscreen extent -1.66,-1.73 1.66,1.73
*SOT23 [mm]
  rect 1x1.4 smd: 1(-0.95,-1.1) 2(0.95,-1.1) 3(0,1.1)
AXIAL-0.3 [mm]
  round 1.4 hole 0.85: 1(-3.81,0) 2(3.81,0)
  silkscreen extent -2.77,-0.76 2.77,0.76
CAPPRD500W65D1000H1800 [mm]
  rect 1.275x1.275 / inner round 1.275 / far side rect 1.275x1.275 hole 0.85: 1(0,0)
  round 1.275 hole 0.85: 2(5,0)
  silkscreen extent -2.5,-5 7.5,5
CDBW [mil]
  rect 44x30 smd paste+0 mask+0: 1(-69,0) 2(69,0)
  silkscreen extent -60,-41 60,41, body extent 0,0 10,10, height 10
DQJ0008A [mil]
  rect 30x27 smd paste-13.5 mask+0: 1(-108.37,75) 2(-108.37,25) 3(-108.37,-25) 4(-108.37,-75) 5(108.37,-75) 6(108.37,-25) 7(108.37,25) 8(108.37,75)
  Top Layer region: -71.43,89 97.57,89 97.57,-89 -71.43,-89
  Top Layer region: 0,-89 0,-89 0,-89 0,-89 0,-89 0,-89 0,-89 0,-89
  Top Layer region: 0,89 0,89 0,89 0,89 0,89 0,89 0,89 0,89
  silkscreen extent -155,-112 128,112, body extent 0,0 10,10, height 10
FUS_VISHAY_MFU08 [mil]
  rect 35.5x55 smd: 1(-35.25,0) 2(35.25,0)
  silkscreen extent -86,-32 5,32, body extent 0,0 10,10, height 10
HDR1X2 [mm]
  rect 1.5x1.5 hole 0.9: 1(0,0)
  round 1.5 hole 0.9: 2(2.54,0)
  silkscreen extent -1.27,-1.27 3.81,1.27
IND_BOURNS_SRP12 [mil]
  rect 144x134 smd paste+0 mask+0: 1(-203.5,0) 2(203.5,0)
  silkscreen extent -322,-259 274,259, body extent 0,0 10,10, height 10
MXA20A [mil]
  rect 56x14 smd: 1(-112,115.16) 2(-112,89.57) 3(-112,63.98) 4(-112,38.39) 5(-112,12.8) 6(-112,-12.8) 7(-112,-38.39) 8(-112,-63.98) 9(-112,-89.57) 10(-112,-115.16) 11(112,-115.16) 12(112,-89.57) 13(112,-63.98) 14(112,-38.39) 15(112,-12.8) 16(112,12.8) 17(112,38.39) 18(112,63.98) 19(112,89.57) 20(112,115.16)
  rect 124x171 smd: 21(0,0)
  silkscreen extent -160,-135 81,135, body extent 0,0 10,10, height 10
RESC0805(2012)_M [mm] "Chip Resistor, Body 2.0x1.3mm, IPC Low Density"
  rect 1.25x1.5 smd: 1(-1.05,0) 2(1.05,0)
  silkscreen extent -0.05,-0.65 0.05,0.65, body extent -1.1,-0.67 1.1,0.67, height 0.7
RESC0805(2012)_N [mm] "Chip Resistor, Body 2.0x1.3mm, IPC Medium Density"
  rect 1.05x1.4 smd: 1(-0.95,0) 2(0.95,0)
  silkscreen extent -0.05,-0.6 0.05,0.6, body extent -1.1,-0.67 1.1,0.68, height 0.7
SAMTEC-FTSH-105-01-X-D [mil] "SAMTEC-FTSH-105-01-X-D Shrouded .05in pitch header"
  rect 40x40 hole 28 mask+3: 1(0,0)
  round 40 hole 28 mask+3: 2(0,50) 3(50,0) 4(50,50) 5(100,0) 6(100,50) 7(150,0) 8(150,50) 9(200,0) 10(200,50)
  silkscreen extent -90,-70 290,119
SG-636 [mm]
  rect 1.3x2.1 smd: 1(-2.54,-2.3) 2(2.54,-2.3) 3(2.54,2.3) 4(-2.54,2.3)
  silkscreen extent -5.25,-3.1 5.25,2.5
SOIC127P600X175-8N [mm]
  rect 1.5x0.6 smd: 1(-2.65,1.905) 2(-2.65,0.635) 3(-2.65,-0.635) 4(-2.65,-1.905) 5(2.65,-1.905) 6(2.65,-0.635) 7(2.65,0.635) 8(2.65,1.905)
  silkscreen extent -3.44,-2.45 1.58,2.81
"Switch 6mm 24V (NO)" [mm]
  round 1.498 hole 0.99: 1(-3.25,2.25) 2(3.25,2.25) 3(-3.25,-2.25) 4(3.25,-2.25)
  silkscreen extent -3.53,-3 3,3
"Test Point Through-hole" [mil]
  round 60 hole 32: 1(20,25)
TO220-5_T [mil]
  rect 60x60 hole 40 mask+0: 1(-268,-50)
  round 60 hole 40 mask+0: 2(-201,-215) 3(-134,-50) 4(-67,-215) 5(0,-50)
  silkscreen extent -346,-120 79,70, body extent 0,0 10,10, height 10
TQFP50P1200X1200X160-64N [mm]
  rect 1.55x0.3 smd mask+0: 1(-5.75,3.75) 2(-5.75,3.25) 3(-5.75,2.75) 4(-5.75,2.25) 5(-5.75,1.75) 6(-5.75,1.25) 7(-5.75,0.75) 8(-5.75,0.25) 9(-5.75,-0.25) 10(-5.75,-0.75) 11(-5.75,-1.25) 12(-5.75,-1.75) 13(-5.75,-2.25) 14(-5.75,-2.75) 15(-5.75,-3.25) 16(-5.75,-3.75) 33(5.75,-3.75) 34(5.75,-3.25) 35(5.75,-2.75) 36(5.75,-2.25) 37(5.75,-1.75) 38(5.75,-1.25) 39(5.75,-0.75) 40(5.75,-0.25) 41(5.75,0.25) 42(5.75,0.75) 43(5.75,1.25) 44(5.75,1.75) 45(5.75,2.25) 46(5.75,2.75) 47(5.75,3.25) 48(5.75,3.75)
  rect 0.3x1.55 smd mask+0: 17(-3.75,-5.75) 18(-3.25,-5.75) 19(-2.75,-5.75) 20(-2.25,-5.75) 21(-1.75,-5.75) 22(-1.25,-5.75) 23(-0.75,-5.75) 24(-0.25,-5.75) 25(0.25,-5.75) 26(0.75,-5.75) 27(1.25,-5.75) 28(1.75,-5.75) 29(2.25,-5.75) 30(2.75,-5.75) 31(3.25,-5.75) 32(3.75,-5.75) 49(3.75,5.75) 50(3.25,5.75) 51(2.75,5.75) 52(2.25,5.75) 53(1.75,5.75) 54(1.25,5.75) 55(0.75,5.75) 56(0.25,5.75) 57(-0.25,5.75) 58(-0.75,5.75) 59(-1.25,5.75) 60(-1.75,5.75) 61(-2.25,5.75) 62(-2.75,5.75) 63(-3.25,5.75) 64(-3.75,5.75)
  silkscreen extent -7.33,-5.05 5.05,5.05, body extent -5.12,-5.12 5.12,5.12, height 1.6

## Part data
3.3V_Power 5V_Power 12V_Power 24V_OUT FLT_3.3V FLT_5V FLT_12V IN_P LP: library part LTST-C171KSKT, "Yellow 2 x 1.25 x 0.8 mm 130Â° Water Clear 50 mcd 2 V LED SMT", Package="0805 Lite-On", Digi-Key_Part_Number=160-1428-1-ND, Digi-Key_Purchase_URL=https://www.digikey.com/product-detail/en/lite-on-inc/LTST-C171KSKT/160-1428-1-ND/386802?utm_source=snapeda&utm_medium=aggregator&utm_campaign=symbol, MF="Lite-On Inc.", MP=LTST-C171KSKT, SnapEDA_Link=https://www.snapeda.com/parts/LTST-C171KSKT/Lite-On%20Inc./view-part/?ref=snap
C1 C2 C3 C4 C5 C6 C7 C8 C9 C10 C12 C13 C14 C15 C16 C17 C18 C19 C20 C21 C22 C23 C24 C25 C26 C27 C28 C30 C31 C32 C33 C34 C35 C36 C37 C38 C39 C40 C41 C42 C43 C44 C45 C46 C48 C49 C50 C51 C52 C53 C54 C55 C56 C57 C58 C59 C60 C61 C62 C65 C66 C67: library part C0805C101JAGAC7800, "100pF Â±5% 250V Ceramic Capacitor C0G, NP0 0805 _2012 Metric_", Package="0805 KEMET", Digi-Key_Part_Number=399-15000-1-ND, Digi-Key_Purchase_URL=https://www.digikey.com/product-detail/en/kemet/C0805C101JAGAC7800/399-15000-1-ND/7382549?utm_source=snapeda&utm_medium=aggregator&utm_campaign=symbol, MF=KEMET, MP=C0805C101JAGAC7800, SnapEDA_Link=https://www.snapeda.com/parts/C0805C101JAGAC7800/KEMET/view-part/3661430/?ref=snap
C11 C29 C47: library part EEUFC1V331, "FC radial elec cap,330uF 35V Panasonic Aluminium Electrolytic Capacitor 330F 35 V dc 10mm Through Hole series FC Radial lifetime 3000h", Manufacturer_Name=Panasonic, Mouser Part Number=1081337, Allied Price/Stock=https://www.alliedelec.com/panasonic-eeufc1v331/70068521/, Allied_Number=70068521, Datasheet Link=https://industrial.panasonic.com/cdbs/www-data/pdf/RDF0000/ABA0000C1209.pdf, Geometry.Height=18mm, Manufacturer_Part_Number=EEUFC1V331, Mouser Price/Stock=http://uk.rs-online.com/web/p/products/1081337, RS Part Number=1081337, RS Price/Stock=http://uk.rs-online.com/web/p/products/1081337
CAN_IN CAN_OUT: library part "Molex micro-fit 4-pin (Single row schematic)", "Molex micro-fit 3.0 dual row header. P/N 0430450427"
F?: library part MFU0805FF02000P5, "No Description Available", Built_By=EMA_UL_Team, Copyright="Copyright (C) 2018 Accelerated Designs. All rights reserved", Manufacturer_Part_Number=MFU0805FF02000P500, RefDes=RefDes, Type=DEV, Vendor=VISHAY
L1 L2: library part SRP1270-6R8M, "No Description Available", Built_By=EMA_UL_Team, Copyright="Copyright (C) 2018 Accelerated Designs. All rights reserved", Manufacturer_Part_Number=SRP1270-6R8M, RefDes=RefDes, Type=DEV, Vendor="Bourns Electronics"
L3: library part Inductor-6.8uH, "No Description Available", Manufacturer_Part_Number=SRP1270-6R8M, Built_By=EMA_UL_Team, Copyright="Copyright (C) 2018 Accelerated Designs. All rights reserved", RefDes=RefDes, Type=DEV, Vendor="Bourns Electronics"
P1: "Header, 2-Pin", LatestRevisionDate=17-Jul-2002, LatestRevisionNote="Re-released for DXP Platform.", Publisher="Altium Limited"
Power3.3V_1 Power3.3V_2 Power3.3V_3 Power5V_1 Power5V_2 Power5V_3 Power12V_1 Power12V_2 Power12V_3 Power12V_4 Power24V_3 Power24V_4: "Molex 6.5MM 2 pin connector, used for power connections. P/N 1510482204 and similar models."
PRG1: "SAMTEC-FTSH-105-01-X-D. Shrouded 10-pin header with .05 in pitch."
Q1 Q2 Q3 Q4 Q5 Q6: "Trans MOSFET N-CH 60V 0.115A 3-Pin SOT-23 T/R", Package="SOT-23-3 ON Semiconductor", Availability=Unavailable, MF="ON Semiconductor", MP=2N7002, Price=None, SnapEDA_Link=https://www.snapeda.com/parts/2N7002/ON%20Semiconductor/view-part/4449003/?ref=snap
R1 R2 R5 R6 R7 R8 R9 R10 R12 R13 R14 R17 R18 R19 R20 R21 R23 R24 R25 R28 R29 R30 R31 R33 R34 R35 R36 R37 R38 R39 R40 R41 R43 R44 R45: library part CMP-1013-00951-1, "8M06 0.125W 1% 0805 (2012 Metric)  SMD", Case-EIA=0805, Case-Metric=2012, Power="0.125 W", Tolerance="1 %", Technology=SMT
R3 R4 R15 R16 R26 R27 R42: library part "120R 5% 0805", "120R 0.125W 5% 0805 (2012 Metric)  SMD", Case-EIA=0805, Case-Metric=2012, Power="0.125 W", Tolerance="5 %", Technology=SMT
R11 R22 R32: library part ERJ-M1WSF12MU, "Res Thick Film 2512 0.012 Ohm 1% 1W Pad SMD Automotive T/R", Package="6432 Panasonic Electronic Components", Digi-Key_Part_Number=P12MCT-ND, Digi-Key_Purchase_URL=https://www.digikey.com/product-detail/en/panasonic-electronic-components/ERJ-M1WSF12MU/P12MCT-ND/300474?utm_source=snapeda&utm_medium=aggregator&utm_campaign=symbol, MF=Panasonic, MP=ERJ-M1WSF12MU, SnapEDA_Link=https://www.snapeda.com/parts/ERJ-M1WSF12MU/Panasonic/view-part/?ref=snap
RESET: library part "Switch 6mm 24V (NO)", "FSM4JAH=6MM TACT SWITCH, HIGH TEMP", Contact_Current_Rating="50 mA", Package=None, Configuration_Pole-Throw="Single Pole - Single Throw", Digi-Key_Part_Number=450-1804-ND, Digi-Key_Purchase_URL=https://www.digikey.com/product-detail/en/te-connectivity-alcoswitch-switches/1825910-7/450-1804-ND/1731414?utm_source=snapeda&utm_medium=aggregator&utm_campaign=symbol, EU_RoHS_Compliance=Compliant, MF="TE Connectivity", MP=1825910-7, SnapEDA_Link=https://www.snapeda.com/parts/1825910-7/TE%20Connectivity%20ALCOSWITCH%20Switches/view-part/?ref=snap, TE_purchase_URL=https://www.te.com/usa-en/product-1825910-7.html?te_bu=Cor&te_type=disp&te_campaign=seda_glo_cor-seda-global-disp-prtnr-fy19-seda-model-bom-cta_sma-317_1&elqCampaignId=32493
TP3 TP4 TP14 TP15 TP25 TP26: library part "Test Point"
U1: library part LT1129CT-5#PBF, "No Description Available", Built_By=EMA_UL_Team, Copyright="Copyright (C) 2018 Accelerated Designs. All rights reserved", Manufacturer_Part_Number=LT1129CT-5#PBF, RefDes=RefDes, Type=DEV, Vendor="Linear Technology"
U2 U6 U10: "No Description Available", Built_By=EMA_UL_Team, Copyright="Copyright (C) 2018 Accelerated Designs. All rights reserved", Manufacturer_Part_Number=CDBW46-G, RefDes=RefDes, Type=DEV, Vendor=Comchip
U3 U7 U11: library part LM25117QPMH/NOPB, "No Description Available", Manufacturer="Texas Instruments", Built_By=EMA_UL_Team, Copyright="Copyright (C) 2018 Accelerated Designs. All rights reserved", Manufacturer_Part_Number=LM25117QPMH/NOPB, RefDes=RefDes, Type=DEV, Vendor="Texas Instruments"
U4 U5 U8 U9 U12 U13: "No Description Available", VALUE_2=Value, Built_By=Texas_Instrument_Team, Copyright="Copyright (C) 2018 Accelerated Designs. All rights reserved", Manufacturer_Part_Number=CSD18514Q5A, RefDes=RefDes, Type=DEV, Vendor="Texas Instruments"
U15: "Microchip MCP2562-E/SN, CAN Transceiver 1MBps 1-channel IEC 61000-4-2, 8-Pin SOIC", Package="SO-8 Microchip", Availability=Unavailable, MF=Microchip, MP=MCP2562-E/SN, Price=None, SnapEDA_Link=https://www.snapeda.com/parts/MCP2562-E/SN/Microchip/view-part/?ref=snap
Y1: library part SG-636, "Standard Clock Oscillators 50MHz 3.3Volt 100ppm -20C +70C", Arrow Part Number="SG-636PCW 50.0000MC3: ROHS", Manufacturer_Name="Epson Timing", Datasheet Link=http://www.mouser.com/ds/2/137/G-636PCE_en-1003252.pdf, Manufacturer_Part_Number="SG-636PCW 50.0000MC3: ROHS"
U14: Part_Number=CY8C4248AZI-L485

## Free pads (board coordinates)
  round 60 hole 125 unplated: 1(1130,4880) 2(1130,1130) 3(6870,1130) 4(6890,4880)

## Via types
v1: diameter 50, hole 28, Top Layer to Bottom Layer, 130 vias

## Nets (pads, with @x,y where several pads share a name; then routed paths per layer and width w, separated by ;. In a path a pad name is that pad's centre, name@x,y a point inside that pad or via, vN(x,y) a via of type N, cw(c..) or ccw(c..) an arc to the next point about the centre after c; other vN are vias at no path point)
+3.3: +3.3.1 C11.1 C13.2 C14.2 L1.1 Power3.3V_1.1 Power3.3V_2.1 Power3.3V_3.1 R6.2 R13.2 TP8.1 | length 1725.5
  Top Layer w15: Power3.3V_2.1@5615.91,1480 5615.91,1424.09 5770,1270 5770,1220 5760,1210 R13.2@5711.34,1210
  Top Layer w20: R6.2@4358.66,3190 4358.66,2991.34 4430,2920 4430,2550 4460,2520 4460,2231.72 4471.72,2220 4640,2220 4673,2253 4673,2279.5 L1.1@4730,2336.5
+5: +5V.1 C29.1 C31.2 C32.2 L2.1 Power5V_1.1 Power5V_2.1 Power5V_3.1 R18.2 R24.2 TP19.1 | length 1828.2
  Top Layer w15: R18.2@3066.63,3227.97 R18.2@3071.56,3227.97 ; R18.2@3088.66,3245.08 R18.2@3088.66,3250 ; Power5V_2.1@3545.91,1490 3545.91,1414.09 3659.46,1300.54 3659.46,1248.12 3633.37,1222.03 3628.44,1222.03 3611.34,1204.92 R24.2@3611.34,1200
  Top Layer w20: R18.2@3066.63,3227.97 3050,3211.34 3050,2930 3160,2820 3160,2440 3210,2390 3210,2250 3240,2220 3450,2220 3474.29,2244.29 3474.29,2304.29 L2.1@3500,2330 ; R18.2@3071.56,3227.97 R18.2@3088.66,3245.08
+12: +12V.1 C47.1 C48.2 C49.2 L3.1 Power12V_1.1 Power12V_2.1 Power12V_3.1 Power12V_4.1 R29.2 R35.2 TP30.1 | length 234
  Top Layer w15: +12V.1@1350,1620 1538.66,1620 1546.63,1612.03 1551.56,1612.03 1568.66,1594.92 R35.2@1568.66,1590
+24V_Input: 24V_IN.1 "INPUT POWER1.1" C4.2 C5.2 C6.2 C7.2 C8.2 C9.2 C10.2 C22.2 C23.2 C24.2 C25.2 C26.2 C27.2 C28.2 C40.2 C41.2 C42.2 C43.2 C44.2 C45.2 C46.2 C66.2 Power24V_1.1 Power24V_2.1 Power24V_3.1 Power24V_4.1 R36.2 R37.2 U1.5 U3.20 U4.5 U4.6 U4.7 U4.8 U7.20 U8.5 U8.6 U8.7 U8.8 U11.20 U12.5 U12.6 U12.7 U12.8 | length 9508.9
  Top Layer w15: v1(2350,3715) 2350,3710 2442,3618 U11.20@2442,3555.16 ; v1(3330,3910) v1@3330,3916.29 ; v1(3550,3670) 3622,3598 U7.20@3622,3545.16 ; v1@4740,3680 4822,3598 U3.20@4822,3575.16
  Top Layer w25: v1@3010,4090 3010,2910 3110,2810 3110,2406.28 3095.36,2391.63 U12.8@3045,2391.63 ; v1(4250,3780) 4270,3760 4270,2970 4300,2940 4350,2940 4385,2905 4385,2416.28 4370.36,2401.63 U8.8@4315,2401.63 ; v1@4315.22,4388.07 4315.22,4405.22 v1(4320,4410) ; v1(5340,4370) v1@5344.78,4365.22 ; v1(5400,3850) 5450,3850 5554.64,3745.36 5554.64,3724.64 5484.5,3654.5 5448,3618 5448,2982 5590,2840 5590,2466.63 U4.8@5515,2391.63
  Bottom Layer w15: v1(2150,4200) 2150,4120 2210,4060 2210,3860 2350,3720 v1(2350,3715) ; v1(3310,4390) 3310,3936.29 v1@3330,3916.29 ; v1(3330,3910) 3330,3750 3390,3690 3523.71,3690 3543.71,3670 v1(3550,3670) ; v1(4480,4370) 4480,3770 4570,3680 4713.71,3680 4717.02,3676.7 4733.3,3676.7 v1(4740,3670)
  Bottom Layer w25: v1@3010,4090 v1(3310,4390) ; v1(4250,3780) 4250,4322.86 v1@4315.22,4388.07 ; v1@5344.78,4365.22 5364.78,4365.22 5400,4330 v1(5400,3850)
  other v1: 3020,4090 5010,4370
CANH: CAN_IN.3 CAN_OUT.3 R42.2 U15.7 | length 2023.1
  Top Layer w10: R42.2@6370,2352.6 6614.49,2352.6 CAN_OUT.3@6711.89,2450
  Top Layer w15: U15.7@6534.33,3895 6625,3895 v1@6640,3880
  Bottom Layer w10: v1(6650,3870) 6650,2950 ; CAN_OUT.3@6711.89,2450 6650,2511.89 6650,2950 ; CAN_IN.3@6711.89,2898.11 6701.89,2898.11 6650,2950
CANL: CAN_IN.4 CAN_OUT.4 P1.1 U15.6 | length 2535.4
  Top Layer w15: U15.6@6534.33,3845 6585,3845 v1@6600,3830
  Bottom Layer w10: P1.1@6400,2710 6530,2710 6610,2790 ; v1(6610,3810) 6610,2790 ; CAN_IN.4@6830,2898.11 6891.89,2898.11 6930,2860 6930,2550 CAN_OUT.4@6830,2450 6820.43,2440.43 6820.43,2420.43 6790,2390 6650,2390 6610,2430 6610,2790
CLOCK: U14.45 Y1.3 | length 574.3
  Top Layer w10: U14.45@5911.42,3726.38 5911.42,3861.42 6093.09,4043.09 Y1.3@6093.09,4191.16
  Top Layer w25: Y1.3@6080,4220 6080,4204.25 Y1.3@6093.09,4191.16
CS_1: C53.2 R31.2 U14.61 | length 5959.1
  Top Layer w5: v1(5701.21,3432.71) 5703.92,3430 5723.46,3430 5738.76,3414.7 5767.51,3414.7 5772.2,3410 U14.61@5773.62,3411.42
  Top Layer w15: R31.2@2300,3128.66 2304.92,3128.66 2322.03,3111.56 2322.03,3106.63 2368.66,3060 2930,3060 2970,3100 2970,3683.71 2966.7,3687.02 2966.7,3706.7 v1@2970,3710 ; C53.2@2860,3715.55 2864.78,3710.77 2949.23,3710.77 2950,3710 v1(2960,3710)
  Bottom Layer w10: v1(2960,3710) 2960,3715.86 2940,3735.86 2940,4325.58 3010,4395.58 3124.42,4510 5440,4510 5692,4258 5692,4115.74 5622,4045.74 5622,4014.26 5692,3944.26 5692,3441.92 v1(5701.21,3432.71)
CS_2: C35.2 R20.2 U14.62 | length 4978.3
  Top Layer w5: v1(5670,3360) 5690,3360 5721.73,3391.73 U14.62@5773.62,3391.73
  Top Layer w15: R20.2@3480,3088.66 3480,3028.79 3488.79,3020 4200,3020 4230,3050 4230,3673.71 4210,3693.71 v1(4210,3700) 4094.45,3700 C35.2@4090,3695.55
  Bottom Layer w10: v1(4210,3700) 4170,3740 4170,4380 4260,4470 5440,4470 5660,4250 5660,4109.2 5604,4053.2 5604,4006.8 5660,3950.8 5660,3385.86 5662.35,3383.51 5662.35,3367.65 v1(5670,3360)
CS_3: C17.2 R9.2 U14.63 | length 3389.3
  Top Layer w5: v1(5638,3290) 5670,3290 5710,3330 5710,3360 5722.05,3372.05 U14.63@5773.62,3372.05
  Top Layer w15: R9.2@4780,3128.66 4789.66,3119 4789.66,3090.34 4810,3070 5400,3070 5420,3090 5420,3660 5460,3700 ; C17.2@5340,3705.55 5424.45,3705.55 5430,3700 5460,3700 ; v1(5475,3740) 5475,3715 5460,3700
  Bottom Layer w10: v1(5475,3740) 5475,3717.78 5470,3722.78 5470,4220 5530,4280 5590,4280 5630,4240 5630,4104.65 5586,4060.65 5586,3999.35 5630,3955.35 5630,3315.86 5630.35,3315.51 5630.35,3297.65 v1(5638,3290)
EN_3.3V: Q2.1 U14.31 | length 1757.8
  Top Layer w5: v1@6270,3712.78 v1(6270,3730)
  Top Layer w10: U14.31@6226.38,3627.95 6277.95,3627.95 6290,3640 6290,3692.78 6277.65,3705.13 6277.65,3711.52 6276.4,3712.78 v1@6270,3712.78
  Top Layer w15: Q2.1@4960,4000 5040,4000 5190,4150 v1(5810,4150)
  Bottom Layer w10: v1(5810,4150) 5920,4150 6270,3800 v1(6270,3730)
EN_5V: Q4.1 U14.32 | length 3003.9
  Top Layer w5: v1(6200,3770) v1@6202.76,3770
  Top Layer w10: v1@6202.76,3770 6226.38,3746.38 U14.32@6226.38,3647.64
  Top Layer w15: Q4.1@3753.31,4002.6 3842.6,4002.6 4130,4290 v1(5260,4290) ; v1(5340,4090) v1(5750,4090)
  Bottom Layer w10: v1(5750,4090) 5910,4090 6196.72,3803.28 6196.72,3773.28 v1(6200,3770)
  Bottom Layer w15: v1(5260,4290) 5260,4170 v1(5340,4090)
EN_12V: Q6.1 U14.33 | length 4053.7
  Top Layer w10: v1(6120,3800) 6135.28,3800 6147.64,3787.64 U14.33@6147.64,3726.38
  Top Layer w15: Q6.1@2520,4020 2790,4020 3020,4250 v1(3920,4250) ; v1(4090,4160) 4170,4240 v1(5070,4240) ; v1(5260,4030) v1(5670,4030)
  Bottom Layer w10: v1(5670,4030) 5890,4030 v1(6120,3800)
  Bottom Layer w15: v1(3920,4250) 4000,4250 v1(4090,4160) ; v1(5070,4240) 5253.3,4056.7 5253.3,4036.7 v1(5260,4030)
FLT_3.3V: FLT_3.3V.NEG U14.55 | length 1563
  Top Layer w10: U14.55@5773.62,3529.53 5710.47,3529.53 5680,3560 5640,3600 5540,3600 5510,3570 5510,3440 5600,3350 5600,3060 5780,2880 5780,2835.86 5785.86,2830 6080,2830 6130,2780 FLT_3.3V.NEG@6130,2741.34
FLT_5V: FLT_5V.NEG U14.54 | length 1413.7
  Top Layer w10: U14.54@5773.62,3549.21 5772.84,3548.43 5737.73,3548.43 5737.6,3548.31 5721.69,3548.31 5693.28,3576.72 5650.81,3619.19 5529.19,3619.19 5491.5,3581.5 5491.5,3428.5 5580,3340 5580,3050 5750,2880 5750,2815.86 5755.86,2810 5880,2810 5910,2780 FLT_5V.NEG@5910,2741.34
FLT_12V: FLT_12V.NEG U14.53 | length 1330.3
  Top Layer w5: 5707.65,3590 5708.59,3590
  Top Layer w10: FLT_12V.NEG@5700,2741.34 5700,2900 5560,3040 5560,3330 5473.5,3416.5 5473.5,3593.5 5520,3640 5660,3640 5684.84,3615.16 ; U14.53@5773.62,3568.9 5772.84,3568.12 5731.88,3568.12 5708.83,3591.17 ; 5684.84,3615.16 5708.83,3591.17 ; 5684.84,3615.16 5708.83,3591.17